# Altium PCB Traffic_light.PcbDoc
Units mil, origin at the board's own origin, x right, y up, seen from the top; angles counter-clockwise.
Board outline 4035 x 3120 mil, 2 copper layers (Top Layer, Bottom Layer); 110 components, 113 nets, 333 pads, 48 vias.
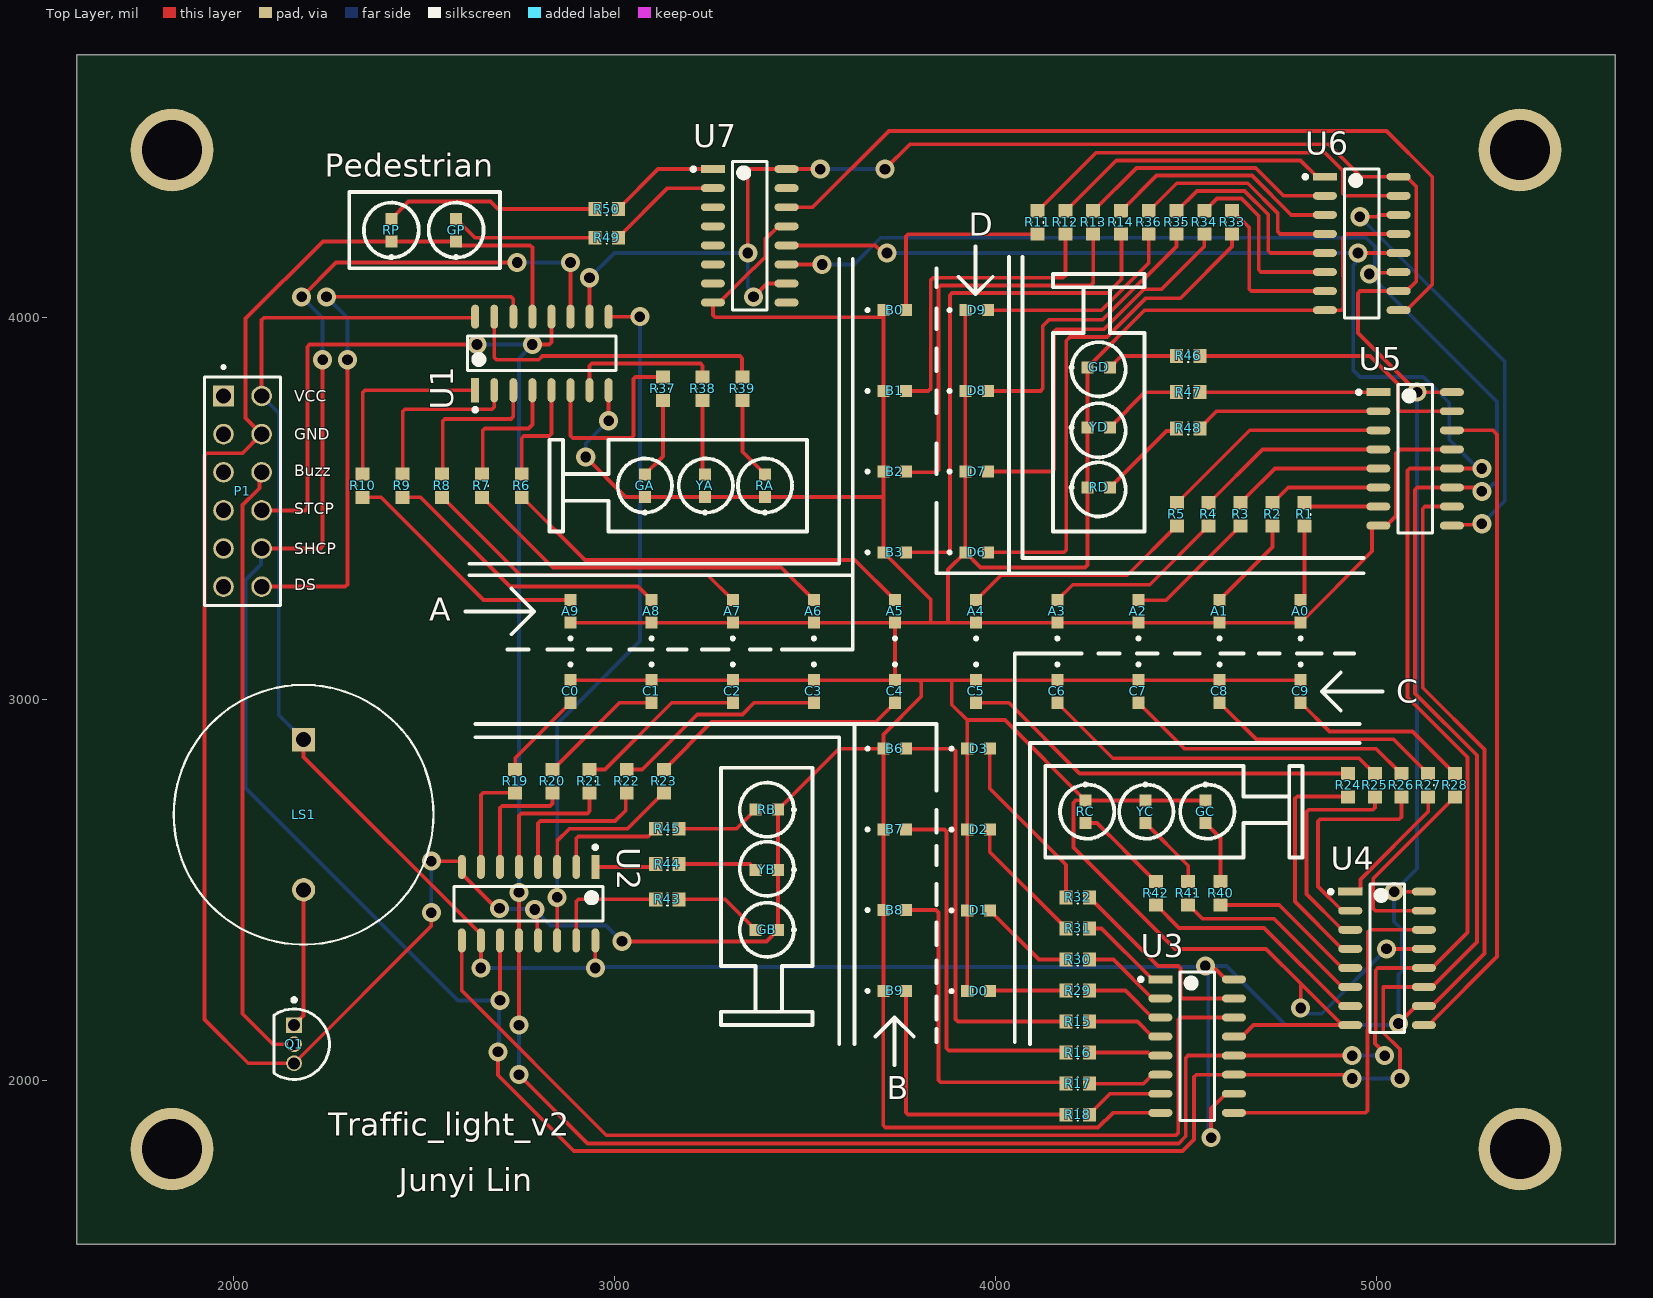
[diagram p0: Top Layer view]
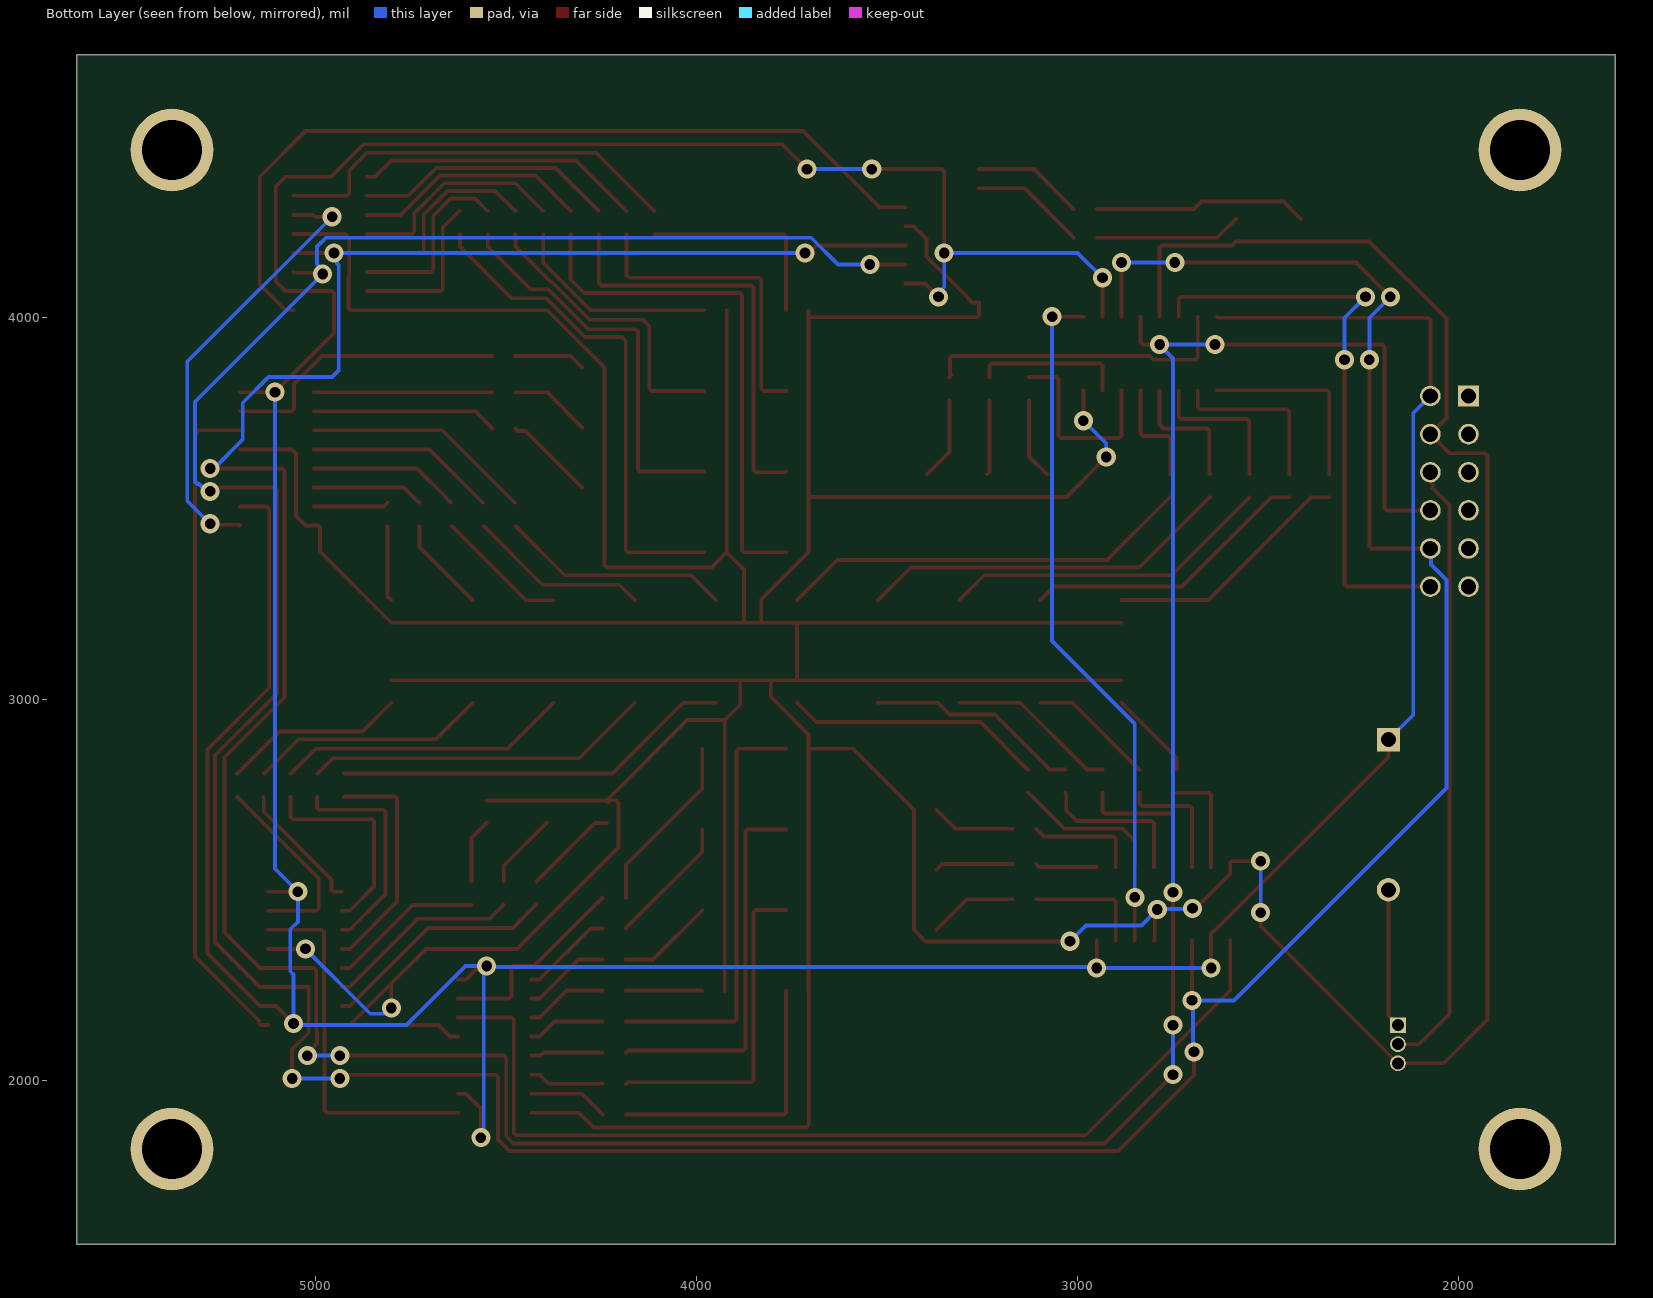
[diagram p1: Bottom Layer view, seen from below]
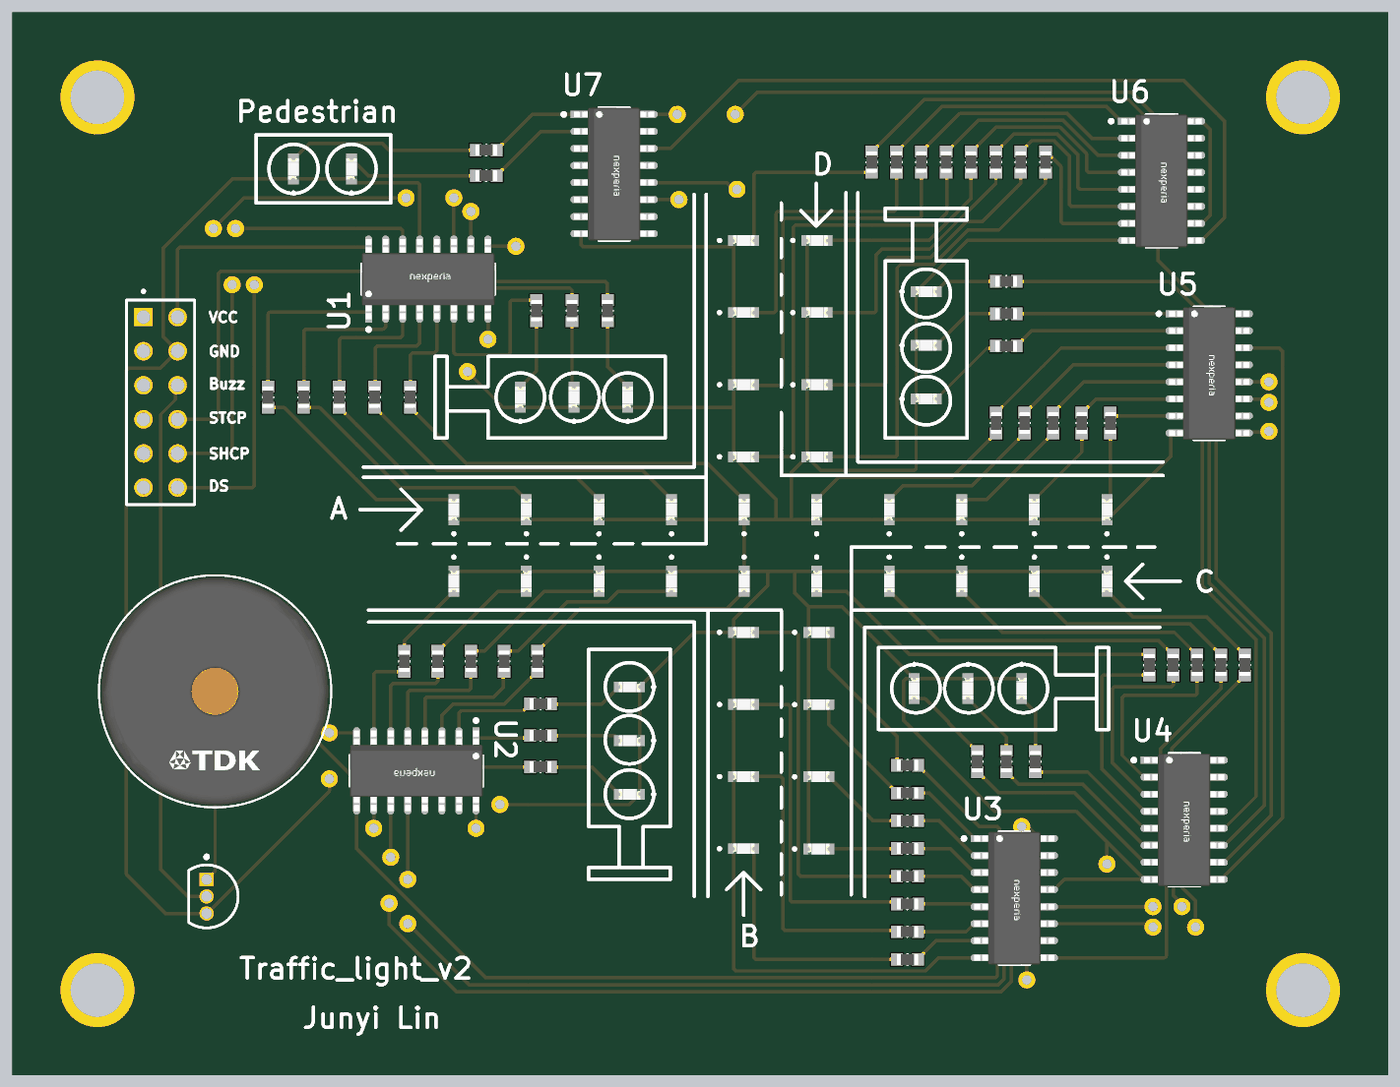
[diagram p2: 3D render of the assembled board from above, using the file's embedded part models]

## Layer stack, top to bottom
Top Solder: solder mask 0.4, Solder Resist, Dk 3.5
Top Layer: signal copper 1.4
Dielectric 1: dielectric 12.6, FR-4, Dk 4.8
Bottom Layer: signal copper 1.4
Bottom Solder: solder mask 0.4, Solder Resist, Dk 3.5

## Board outline
1590,1570 1590,4690 5625,4690 5625,1570

## Design rules (kind name [scope] priority, off if disabled: settings)
Clearance [All] p1: gap=10 ignorepadtopadclearanceinfootprint=FALSE
HoleSize [All] p1: absolutevalues=TRUE maxlimit=200 minlimit=1 maxpercent=80.000 minpercent=20.000
PolygonConnect [All] p1: connectstyle=Relief reliefconductorwidth=10 reliefentries=4 polygonreliefangle="90 Angle" airgapwidth=10
RoutingVias [All] p1: holewidth=28 width=50 viastyle="Through Hole" minholewidth=28 minwidth=50 maxholewidth=28 maxwidth=50
SolderMaskExpansion [All] p1: expansion=0 istentingtop=FALSE
SupplyNets "Schematic Supply Nets" [InNet('GND')] p1: voltage=0.000
Width [All] p1: maxlimit=10 minlimit=10 preferedwidth=10
29 further rules are at their usual default settings.

## Components (designator, comment, footprint, x,y, rotation, side; value= is the part's Value field where it differs from the comment)
A0 "KT-0603W" LED_KT-0603R 4800,3230 r90 top
A1 "KT-0603W" LED_KT-0603R 4587.22,3230 r90 top
A2 "KT-0603W" LED_KT-0603R 4374.44,3230 r90 top
A3 "KT-0603W" LED_KT-0603R 4161.67,3230 r90 top
A4 "KT-0603W" LED_KT-0603R 3948.89,3230 r90 top
A5 "KT-0603W" LED_KT-0603R 3736.11,3230 r90 top
A6 "KT-0603W" LED_KT-0603R 3523.33,3230 r90 top
A7 "KT-0603W" LED_KT-0603R 3310.56,3230 r90 top
A8 "KT-0603W" LED_KT-0603R 3097.78,3230 r90 top
A9 "KT-0603W" LED_KT-0603R 2885,3230 r90 top
B0 "KT-0603W" LED_KT-0603R 3735,4020 r0 top
B1 "KT-0603W" LED_KT-0603R 3735,3808.33 r0 top
B2 "KT-0603W" LED_KT-0603R 3735,3596.67 r0 top
B3 "KT-0603W" LED_KT-0603R 3735,3385 r0 top
B6 "KT-0603W" LED_KT-0603R 3735,2870 r0 top
B7 "KT-0603W" LED_KT-0603R 3735,2658.33 r0 top
B8 "KT-0603W" LED_KT-0603R 3735,2446.67 r0 top
B9 "KT-0603W" LED_KT-0603R 3735,2235 r0 top
C0 "KT-0603W" LED_KT-0603R 2885,3020 r270 top
C1 "KT-0603W" LED_KT-0603R 3097.78,3020 r270 top
C2 "KT-0603W" LED_KT-0603R 3310.56,3020 r270 top
C3 "KT-0603W" LED_KT-0603R 3523.33,3020 r270 top
C4 "KT-0603W" LED_KT-0603R 3736.11,3020 r270 top
C5 "KT-0603W" LED_KT-0603R 3948.89,3020 r270 top
C6 "KT-0603W" LED_KT-0603R 4161.67,3020 r270 top
C7 "KT-0603W" LED_KT-0603R 4374.44,3020 r270 top
C8 "KT-0603W" LED_KT-0603R 4587.22,3020 r270 top
C9 "KT-0603W" LED_KT-0603R 4800,3020 r270 top
D0 "KT-0603W" LED_KT-0603R 3955,2234 r0 top
D1 "KT-0603W" LED_KT-0603R 3955,2446 r0 top
D2 "KT-0603W" LED_KT-0603R 3955,2658 r0 top
D3 "KT-0603W" LED_KT-0603R 3955,2870 r0 top
D6 "KT-0603W" LED_KT-0603R 3950,3385 r0 top
D7 "KT-0603W" LED_KT-0603R 3950,3596.67 r0 top
D8 "KT-0603W" LED_KT-0603R 3950,3808.33 r0 top
D9 "KT-0603W" LED_KT-0603R 3950,4020 r0 top
GA "KT-0603G" LED_KT-0603R 3080,3560 r90 top
GB "KT-0603G" LED_KT-0603R 3400,2395 r180 top
GC "KT-0603G" LED_KT-0603R 4550,2705 r270 top
GD "KT-0603G" LED_KT-0603R 4270,3870 r0 top
GP "KT-0603G" LED_KT-0603R 2585,4230 r90 top
LS1 "PS1720P02" FP-PS1720P02-MFG 2185,2696.85 r270 top
P1 "TSW-106-07-T-D" SAMTEC_TSW-106-07-T-D 2025,3545 r270 top
Q1 "BS170" ONSC-TO-92-3-29-11 2160,2095 r270 top
R1 "Res1" RESC1608X55N 4810,3484.29 r270 top value=270
R2 "Res1" RESC1608X55N 4726.25,3484.29 r270 top value=270
R3 "Res1" RESC1608X55N 4642.5,3484.29 r270 top value=270
R4 "Res1" RESC1608X55N 4558.75,3484.29 r270 top value=270
R5 "Res1" RESC1608X55N 4475,3484.29 r270 top value=270
R6 "Res1" RESC1608X55N 2757.14,3560 r270 top value=270
R7 "Res1" RESC1608X55N 2652.86,3560 r270 top value=270
R8 "Res1" RESC1608X55N 2548.57,3560 r270 top value=270
R9 "Res1" RESC1608X55N 2444.29,3560 r270 top value=270
R10 "Res1" RESC1608X55N 2340,3560 r270 top value=270
R11 "Res1" RESC1608X55N 4110,4250 r270 top value=270
R12 "Res1" RESC1608X55N 4182.86,4250 r270 top value=270
R13 "Res1" RESC1608X55N 4255.71,4250 r270 top value=270
R14 "Res1" RESC1608X55N 4328.57,4250 r270 top value=270
R15 "Res1" RESC1608X55N 4215,2154.29 r180 top value=270
R16 "Res1" RESC1608X55N 4215,2072.86 r180 top value=270
R17 "Res1" RESC1608X55N 4215,1991.43 r180 top value=270
R18 "Res1" RESC1608X55N 4215,1910 r180 top value=270
R19 "Res1" RESC1608X55N 2740,2785 r90 top value=270
R20 "Res1" RESC1608X55N 2837.5,2785 r90 top value=270
R21 "Res1" RESC1608X55N 2935,2785 r90 top value=270
R22 "Res1" RESC1608X55N 3032.5,2785 r90 top value=270
R23 "Res1" RESC1608X55N 3130,2785 r90 top value=270
R24 "Res1" RESC1608X55N 4924.25,2774.02 r90 top value=270
R25 "Res1" RESC1608X55N 4994.25,2774.02 r90 top value=270
R26 "Res1" RESC1608X55N 5064.25,2774.02 r90 top value=270
R27 "Res1" RESC1608X55N 5134.25,2774.02 r90 top value=270
R28 "Res1" RESC1608X55N 5204.25,2774.02 r90 top value=270
R29 "Res1" RESC1608X55N 4215,2235.71 r180 top value=270
R30 "Res1" RESC1608X55N 4215,2317.14 r180 top value=270
R31 "Res1" RESC1608X55N 4215,2398.57 r180 top value=270
R32 "Res1" RESC1608X55N 4215,2480 r180 top value=270
R33 "Res1" RESC1608X55N 4620,4250 r270 top value=270
R34 "Res1" RESC1608X55N 4547.14,4250 r270 top value=270
R35 "Res1" RESC1608X55N 4474.28,4250 r270 top value=270
R36 "Res1" RESC1608X55N 4401.43,4250 r270 top value=270
R37 "Res1" RESC1608X55N 3127.18,3814.02 r270 top value=270
R38 "Res1" RESC1608X55N 3231.46,3814.02 r270 top value=270
R39 "Res1" RESC1608X55N 3335.75,3814.02 r270 top value=270
R40 "Res1" RESC1608X55N 4590,2490.71 r90 top value=270
R41 "Res1" RESC1608X55N 4505,2490.71 r90 top value=270
R42 "Res1" RESC1608X55N 4420,2490.71 r90 top value=270
R43 "Res1" RESC1608X55N 3139.29,2475 r0 top value=270
R44 "Res1" RESC1608X55N 3139.29,2567.5 r0 top value=270
R45 "Res1" RESC1608X55N 3139.29,2660 r0 top value=270
R46 "Res1" RESC1608X55N 4505,3900 r180 top value=270
R47 "Res1" RESC1608X55N 4505,3805 r180 top value=270
R48 "Res1" RESC1608X55N 4505,3710 r180 top value=270
R49 "Res1" RESC1608X55N 2980,4210 r180 top value=270
R50 "Res1" RESC1608X55N 2980,4285 r180 top value=270
RA "KT-0603R" LED_KT-0603R 3395,3560 r90 top
RB "KT-0603R" LED_KT-0603R 3400,2710 r180 top
RC "KT-0603R" LED_KT-0603R 4235,2705 r270 top
RD "KT-0603R" LED_KT-0603R 4270,3555 r0 top
RP "KT-0603R" LED_KT-0603R 2415,4230 r90 top
U1 "74HC595D,118" FP-SOT109-1-IPC_C 2810,3906.49 r90 top
U2 "74HC595D,118" FP-SOT109-1-IPC_C 2775,2463.51 r270 top
U3 "74HC595D,118" FP-SOT109-1-IPC_C 4528.51,2090 r0 top
U4 "74HC595D,118" FP-SOT109-1-IPC_C 5026.49,2320 r0 top
U5 "74HC595D,118" FP-SOT109-1-IPC_C 5100,3630 r0 top
U6 "74HC595D,118" FP-SOT109-1-IPC_C 4960,4195 r0 top
U7 "74HC595D,118" FP-SOT109-1-IPC_C 3355,4215 r0 top
YA "KT-0603Y" LED_KT-0603R 3237.5,3560 r90 top
YB "KT-0603Y" LED_KT-0603R 3400,2552.5 r180 top
YC "KT-0603Y" LED_KT-0603R 4392.5,2705 r270 top
YD "KT-0603Y" LED_KT-0603R 4270,3712.5 r0 top

## Footprints (in the part's own frame and the unit in brackets; to place one, negate y for a bottom-side part, rotate by r counter-clockwise, add the part's x,y. Pads: shape width x height; smd on the part's side, far side on the other; paste and mask are expansions set on the pad)
FP-PS1720P02-MFG [mm]
  rect 1.55x1.55 hole 1 paste-2539.97 mask+0: 1(-5,0)
  round 1.55 hole 1 paste-2539.97 mask+0: 2(5,0)
  silkscreen extent -8.65,-8.65 8.65,8.65, body extent -8.75,-8.75 8.75,8.75, height 0.25
FP-SOT109-1-IPC_C [mil]
  rect 63.17x20.79 smd paste+0 mask+0: 1(-96.49,175)
  rrect100% 63.17x20.79 smd paste+0 mask+0: 2(-96.49,125) 3(-96.49,75) 4(-96.49,25) 5(-96.49,-25) 6(-96.49,-75) 7(-96.49,-125) 8(-96.49,-175) 9(96.49,-175) 10(96.49,-125) 11(96.49,-75) 12(96.49,-25) 13(96.49,25) 14(96.49,75) 15(96.49,125) 16(96.49,175)
  silkscreen extent -153,-195 45,195, body extent -132,-199 132,199, height 10
LED_KT-0603R [mm]
  rect 0.8x0.8 smd: A(0.75,0) C(-0.75,0)
  silkscreen extent -1.9,-0.1 -1.7,0.1, body extent -0.8,-0.4 0.8,0.4, height 0.65
ONSC-TO-92-3-29-11 [mm] "TO, 3-Leads, Body Dia 4.7mm, Pitch 1.27mm"
  rect 1.05x1.05 hole 0.8: 1(-1.27,0)
  round 1.05 hole 0.8: 2(0,0) 3(1.27,0)
  silkscreen extent -3.07,-1.34 2.35,2.35, body extent -2.35,-1.33 2.36,2.36, height 7.87
RESC1608X55N [mm]
  rect 0.87x0.93 smd paste+0 mask+0.102: 1(-0.78,0) 2(0.78,0)
  silkscreen extent -0.03,-0.4 0.03,0.4, body extent -0.8,-0.4 0.8,0.4, height 0.55
SAMTEC_TSW-106-07-T-D [mm]
  rect 1.37x1.37 hole 1.02: 01(-6.35,-1.27)
  round 1.37 hole 1.02: 02(-6.35,1.27) 03(-3.81,-1.27) 04(-3.81,1.27) 05(-1.27,-1.27) 06(-1.27,1.27) 07(1.27,-1.27) 08(1.27,1.27) 09(3.81,-1.27) 10(3.81,1.27) 11(6.35,-1.27) 12(6.35,1.27)
  silkscreen extent -8.37,-2.54 7.62,2.54

## Part data
A0 A1 A2 A3 A4 A5 A6 A7 A8 A9 B0 B1 B2 B3 B6 B7 B8 B9 C0 C1 C2 C3 C4 C5 C6 C7 C8 C9 D0 D1 D2 D3 D6 D7 D8 D9: library part KT-0603R, "White 0603 Light Emitting Diodes", JLCPCB Part=C2290, Package=Package, Check_prices=https://www.snapeda.com/parts/KT-0603R/Hubei+KENTO+Elec/view-part/?ref=eda, MF="Hubei KENTO Elec", MP=KT-0603W, SnapEDA_Link=https://www.snapeda.com/parts/KT-0603R/Hubei+KENTO+Elec/view-part/?ref=snap
GA GB GC GD GP: library part KT-0603R, "Green 0603 Light Emitting Diodes", JLCPCB Part=C12624, Package=Package, Check_prices=https://www.snapeda.com/parts/KT-0603R/Hubei+KENTO+Elec/view-part/?ref=eda, MF="Hubei KENTO Elec", MP=KT-0603G, SnapEDA_Link=https://www.snapeda.com/parts/KT-0603R/Hubei+KENTO+Elec/view-part/?ref=snap
LS1: library part CMP-08413-000001-1, "AUDIO PIEZO TRANSDUCER 30V TH", Frequency=2kHz, Manufacturer="TDK Corporation", Package=0, Temperature="-10°C to +70°C", Temperature Range High=+70°C, Temperature Range Low=-10°C, Automotive=No, Category=Speak, ComponentLink2Description=Datasheet, ComponentLink2URL=https://product.tdk.com/info/en/catalog/datasheets/piezoelectronic_buzzer_ps_en.pdf, Device Class L1=Electromechanical, Device Class L2="Audio Products", Device Class L3=Buzzers, Digikey Description="AUDIO PIEZO TRANSDUCER 30V TH", Height=8.3mm, Lead Free=Yes, Manufacturer Part Number=PS1720P02, Mouser Description="Audio Indicators & Alerts Round 17mmx8mm 2 kHz Vin=3V", Octopart=https://octopart.com/ps1720p02-tdk-154429, RoHS=TRUE, Standoff Height=0.5mm
P1: "TSW - Samtec 2.54mm Pin Header 10.92mm Overall Pin Length (07) - Fast Stock", Package=None, Supplier Part Number 1=1802231, Availability="In Stock", Check_prices=https://www.snapeda.com/parts/TSW-106-07-T-D/Samtec/view-part/2815469/?ref=eda, MF=Samtec, MP=TSW-106-07-T-D, Price=None, Purchase-URL=https://pricing.snapeda.com/search/part/TSW-106-07-T-D/?ref=eda, SnapEDA_Link=https://www.snapeda.com/parts/TSW-106-07-T-D/Samtec/view-part/2815469/?ref=snap, Supplier 1=RS
Q1: library part CMP-1058-00929-1, "Small Signal MOSFET, 500 mA, 60 V, N-Channel, 3-Pin TO-92, Bulk Box", Manufacturer="On Semiconductor", Package Type=TO-92, Channel Polarity="N Channel", ComponentLink1Description="Manufacturer URL", ComponentLink1URL=http://www.onsemi.com/, ComponentLink2Description=Datasheet, ComponentLink2URL=http://www.onsemi.com/pub_link/Collateral/BS170-D.PDF, ComponentLink3Description="Package Specification", ComponentLink3URL=http://www.onsemi.cn/pub_link/Collateral/2N6426-D.PDF, Configuration=Single, DatasheetVersion="Rev. 6", ID Max (A)=0.5, Mounting Technology="Through Hole", PackageDescription="3-Pin Transistor Outline, Body 4.825 x 3.685 mm, Pitch 1.27 mm", PackageReference=TO-92-3-29-11_AM_SL, PackageVersion="Rev. AM", Packing="Bulk Box", PartNumber=BS170, PD Max (W)=0.35, V(BR)DSS Min (V)=60, VGS Max (V)=20, VGS(th) Max (V)=3
R1 R2 R3 R4 R5 R6 R7 R8 R9 R10 R11 R12 R13 R14 R15 R16 R17 R18 R19 R20 R21 R22 R23 R24 R25 R26 R27 R28 R29 R30 R31 R32 R33 R34 R35 R36 R37 R38 R39 R40 R41 R42 R43 R44 R45 R46 R47 R48 R49 R50: "resistor", JLCPCB Part=C22966, Supplier Part Number 1=CFR-25JB-52-270R, LatestRevisionDate=17-Jul-2002, LatestRevisionNote="Re-released for DXP Platform.", PackageDescription="Axial Device, Thru-Hole; 2 Leads; 0.3 in Pin Spacing", PackageReference=AXIAL-0.3, Published=8-Jun-2000, Publisher="Altium Limited", Supplier 1=Farnell
RA RB RC RD RP: "Red 0603 Light Emitting Diodes", JLCPCB Part=C2286, Package=Package, Check_prices=https://www.snapeda.com/parts/KT-0603R/Hubei+KENTO+Elec/view-part/?ref=eda, MF="Hubei KENTO Elec", MP=KT-0603R, SnapEDA_Link=https://www.snapeda.com/parts/KT-0603R/Hubei+KENTO+Elec/view-part/?ref=snap
U1 U2 U3 U4 U5 U6 U7: library part CMP-14351-000006-1, "IC SHIFT REGISTER 8BIT 16SOIC", JLCPCB Part=C5947, RoHS Compliant=Yes
YA YB YC YD: library part KT-0603R, "Yellow 0603 Light Emitting Diodes", JLCPCB Part=C2287, Package=Package, Check_prices=https://www.snapeda.com/parts/KT-0603R/Hubei+KENTO+Elec/view-part/?ref=eda, MF="Hubei KENTO Elec", MP=KT-0603R, SnapEDA_Link=https://www.snapeda.com/parts/KT-0603R/Hubei+KENTO+Elec/view-part/?ref=snap

## Free pads (board coordinates)
  round 216.54 hole 157.48: 2(1840,4440) 3(5375,4440) 4(5375,1820) 5(1840,1820)

## Via types
v1: diameter 50, hole 28, Top Layer to Bottom Layer, 48 vias

## Nets (pads, with @x,y where several pads share a name; then routed paths per layer and width w, separated by ;. In a path a pad name is that pad's centre, name@x,y a point inside that pad or via, vN(x,y) a via of type N, cw(c..) or ccw(c..) an arc to the next point about the centre after c; other vN are vias at no path point)
A0: R1.1 U5.7 | length 197.7
  Top Layer w10: R1.1 4820,3505 U5.7
A1: R2.1 U5.6 | length 293.8
  Top Layer w10: R2.1 4727.43,3515 4767.43,3555 U5.6
A2: R3.1 U5.5 | length 399
  Top Layer w10: R3.1 4643.68,3515 4655.81,3527.13 4655.81,3528.31 4732.5,3605 U5.5
A3: R4.1 U5.4 | length 502.7
  Top Layer w10: R4.1 4559.93,3515 4699.93,3655 U5.4
A4: R5.1 U5.3 | length 607.2
  Top Layer w10: R5.1 4476.18,3515 4666.18,3705 U5.3
A5: R6.1 U1.5 | length 290.3
  Top Layer w10: R6.1 2757.14,3684.14 2763,3690 2829.14,3690 2835,3695.86 U1.5
A6: R7.1 U1.4 | length 340.9
  Top Layer w10: R7.1 2655,3592.85 2655,3704.14 2660.86,3710 2775,3710 2785,3720 U1.4
A7: R8.1 U1.3 | length 398
  Top Layer w10: R8.1 2550,3592.14 2550,3729.14 2555.86,3735 2729.14,3735 2735,3740.86 U1.3
A8: R9.1 U1.2 | length 452.7
  Top Layer w10: R9.1 2445,3591.42 2445,3754.14 2450.86,3760 2679.14,3760 2685,3765.86 U1.2
A9: R10.1 U1.1 | length 510.9
  Top Layer w10: R10.1 2340,3804.14 2345.86,3810 U1.1
B0: R11.1 U6.15 | length 1091.8
  Top Layer w10: R11.1 4111.18,4280.71 4263.31,4432.83 4863.86,4432.83 4910.09,4386.61 4910.09,4325.86 4915.95,4320 U6.15
B1: R12.1 U6.1 | length 753.1
  Top Layer w10: R12.1 4184.04,4280.71 4316.16,4412.83 4799.48,4412.83 4842.32,4370 U6.1
B2: R13.1 U6.2 | length 684.4
  Top Layer w10: R13.1 4256.9,4280.71 4369.02,4392.83 4682.17,4392.83 4755,4320 U6.2
B3: R14.1 U6.3 | length 615.7
  Top Layer w10: R14.1 4329.75,4280.71 4421.88,4372.83 4672.17,4372.83 4775,4270 U6.3
B6: R15.1 U3.4 | length 202.6
  Top Layer w10: R15.1 4371.54,2154.29 4410.83,2115 U3.4
B7: R16.1 U3.5 | length 189.6
  Top Layer w10: R16.1 4400.05,2072.86 4407.91,2065 U3.5
B8: R17.1 U3.6 | length 196.1
  Top Layer w10: R17.1 4387.26,1991.43 4410.83,2015 U3.6
B9: R18.1 U3.7 | length 209.8
  Top Layer w10: R18.1 4245.71,1911.18 4299.53,1965 U3.7
Buzz: P1.06 Q1.2 | length 1608.8
  Top Layer w10: P1.06 2068.98,3588.98 2068.98,3553.03 2025,3509.06 2025,2175 2105,2095 Q1.2
C0: R19.1 U2.7 | length 280.9
  Top Layer w10: U2.7 2650,2748.43 2655.86,2754.29 R19.1
C1: R20.1 U2.6 | length 324.9
  Top Layer w10: U2.6 2700,2714.14 2705.86,2720 2831.64,2720 2837.5,2725.86 R20.1
C2: R21.1 U2.5 | length 372.4
  Top Layer w10: U2.5 2750,2694.14 2755.86,2700 2929.14,2700 2935,2705.86 R21.1
C3: R22.1 U2.4 | length 405.3
  Top Layer w10: U2.4 2800,2674.14 2805.86,2680 3001.72,2680 3030,2708.28 3030,2751.79 R22.1
C4: R23.1 U2.3 | length 400.1
  Top Layer w10: U2.3 2850,2627.68 2882.32,2660 3034.53,2660 3128.82,2754.29 R23.1
C5: R24.1 U4.4 | length 609
  Top Layer w10: R24.1 4922.56,2745 4790.86,2745 4785,2739.14 4785,2468.81 4908.81,2345 U4.4
C6: R25.1 U4.3 | length 581.8
  Top Layer w10: U4.3 4908.81,2395 4815,2488.81 4815,2704.14 4820.86,2710 4989.14,2710 4995,2715.86 4995,2742.56 R25.1
C7: R26.1 U4.2 | length 558.3
  Top Layer w10: U4.2 4908.81,2445 4845,2508.81 4845,2679.14 4850.86,2685 5058.39,2685 5064.25,2690.86 R26.1
C8: R27.1 U4.1 | length 345.3
  Top Layer w10: U4.1 4951.19,2495 4956.58,2500.39 4956.58,2526.95 5134.25,2704.62 R27.1
C9: R28.1 U4.15 | length 517.3
  Top Layer w10: U4.15 4995.86,2445 4990,2450.86 4990,2529.05 5190.94,2730 5190.94,2731.18 5203.07,2743.31 R28.1
D0: R29.1 U3.3 | length 215.6
  Top Layer w10: R29.1 4340.11,2235.71 4410.83,2165 U3.3
D1: R30.1 U3.2 | length 228.6
  Top Layer w10: R30.1 4308.68,2317.14 4410.83,2215 U3.2
D2: R31.1 U3.1 | length 242
  Top Layer w10: R31.1 4277.83,2398.57 4405.43,2270.97 4405.43,2270.39 4410.83,2265 U3.1
D3: R32.1 U3.15 | length 532.7
  Top Layer w10: R32.1 4245.71,2478.82 4257.83,2466.69 4259.02,2466.69 4425.71,2300 4479.14,2300 4485,2294.14 4485,2220.86 4490.86,2215 U3.15
D6: R33.1 U6.7 | length 425.1
  Top Layer w10: R33.1 4621.18,4280.71 4665,4236.89 4665,4075.86 4670.86,4070 U6.7
D7: R34.1 U6.6 | length 492.4
  Top Layer w10: R34.1 4548.32,4280.71 4580.45,4312.83 4644.52,4312.83 4690,4267.35 4690,4125.86 4695.86,4120 U6.6
D8: R35.1 U6.5 | length 533.8
  Top Layer w10: R35.1 4475.47,4280.71 4527.59,4332.83 4652.8,4332.83 4715,4270.64 4715,4175.86 4720.86,4170 U6.5
D9: R36.1 U6.4 | length 575.1
  Top Layer w10: R36.1 4402.61,4280.71 4474.74,4352.83 4661.09,4352.83 4740,4273.92 4740,4225.86 4745.86,4220 U6.4
DS: P1.12 U1.14 | length 1542.9
  Top Layer w10: P1.12 2294.14,3295 2300,3300.86 v1(2300,3890) ; v1(2245,4055) 2729.14,4055 2735,4049.14 U1.14
  Bottom Layer w10: v1(2245,4055) 2300,4000 v1(2300,3890)
GA: R37.1 U1.6 | length 517
  Top Layer w10: U1.6 2885,3690.86 2890.86,3685 3044.14,3685 3050,3690.86 3050,3839.14 3055.86,3845 3126.9,3845 R37.1
GB: R43.1 U2.15 | length 313.1
  Top Layer w10: U2.15 2900,2469.14 2905.86,2475 R43.1
GC: R40.1 U4.5 | length 408.3
  Top Layer w10: R40.1 4743.81,2460 4908.81,2295 U4.5
GD: R46.1 U5.15 | length 759.4
  Top Layer w10: R46.1 4981.72,3900 5055,3826.72 5055,3760.86 5060.86,3755 U5.15
GND: A0.C A1.C A2.C A3.C A4.C A5.C A6.C A7.C A8.C A9.C B0.C B1.C B2.C B3.C B6.C B7.C B8.C B9.C C0.C C1.C C2.C C3.C C4.C C5.C C6.C C7.C C8.C C9.C D0.C D1.C D2.C D3.C D6.C D7.C D8.C D9.C GA.C GB.C GC.C GD.C GP.C P1.04 Q1.3 RA.C RB.C RC.C RD.C RP.C U1.8 U1.13 U2.8 U2.13 U3.8 U3.13 U4.8 U4.13 U5.8 U5.13 U6.8 U6.13 U7.8 U7.13 YA.C YB.C YC.C YD.C | length 21208.1
  Top Layer w10: v1(2520,2440) 2520,2404.56 2160.44,2045 Q1.3 2040,2045 1925,2160 1925,3639.14 1930.86,3645 2025,3645 P1.04 2033.03,3736.97 2033.03,3998.03 2235.47,4200.47 RP.C GP.C 2595.47,4190 2779.14,4190 2785,4184.14 U1.13 ; v1(2520,2575) 2595.02,2575 2600,2570.02 U2.8 2600,2541.73 2690.56,2451.17 v1(2698.83,2451.17) ; v1(2791.17,2448.23) 2797.94,2441.46 2797.94,2369.08 U2.13 ; C0.C C1.C C2.C C3.C C4.C ; A9.C A8.C A7.C A6.C A5.C ; v1(2925,3635) 3029.53,3530.47 GA.C YA.C RA.C 3705,3530.47 3705.47,3530 ; v1(2985,3730) U1.8 ; v1(3020,2365) 3020.75,2364.25 3398.78,2364.25 GB.C YB.C RB.C 3589.53,2870 B6.C ; U7.13 3430.3,4240 3396.67,4206.37 3396.67,4160.1 3366.57,4130 3365,4130 3285.09,4050.09 3285.09,4048.31 3276.78,4040 U7.8 3258.51,4007.35 3264.37,4001.49 3703.98,4001.49 3705.47,4000 ; B0.C 3705.47,4000 ; D9.C D8.C D7.C D6.C ; D0.C 3925.31,2234.17 3925.31,2445.83 D1.C D2.C D3.C 3925.47,2944.9 ; U3.8 4307.35,1915 4268.75,1876.4 3710.86,1876.4 3705,1882.26 3705,2234.53 B9.C B8.C B7.C B6.C ; GC.C YC.C RC.C ; U3.13 4646.19,2115 4676.19,2145 U4.8@4908.81,2145 ; v1(4800,2190) 4800,2253.81 ; C9.C C8.C C7.C C6.C C5.C 3885,3049.53 ; U4.8 U4.8@4908.81,2145 ; v1(5025,2345) U4.13 ; U6.13 4920.86,4220 4910.09,4209.23 4910.09,4109.96 4912.5,4107.56 4912.5,4025.86 4906.64,4020 4390.47,4020 GD.C YD.C RD.C 4240.47,3351.33 4234.61,3345.47 3960,3345.47 D6.C ; U5.13 5060.86,3655 5050.09,3644.23 5050.09,3480.39 5024.7,3455 U5.8 4992.3,3455 4987.32,3450.02 4987.32,3387.79 A0.C A1.C A2.C A3.C A4.C 3875,3200.47 ; B6.C 3705.47,2907.12 3805,3006.65 3805,3043.67 3799.14,3049.53 ; 3705.47,3530 B2.C B1.C 3705.47,4000 ; 3705.47,3530 B3.C 3830,3260.47 3830,3200.47 ; C4.C 3799.14,3049.53 ; C4.C A5.C ; A5.C 3830,3200.47 ; 3799.14,3049.53 3885,3049.53 ; 3830,3200.47 3875,3200.47 ; 3875,3200.47 3875,3339.53 D6.C ; 3885,3049.53 3885,2985.37 3925.47,2944.9 ; 3925.47,2944.9 4024.63,2944.9 RC.C ; RC.C 4230.47,2730 4225.47,2735 4210.86,2735 4204.25,2728.39 4204.25,2610.75 4470,2345 4708.81,2345 4800,2253.81 ; 4800,2253.81 U4.8@4908.81,2145
  Bottom Layer w10: v1(2520,2440) v1(2520,2575) ; v1(2698.83,2451.17) 2700.3,2449.7 2789.7,2449.7 v1(2791.17,2448.23) 2832.78,2406.62 2978.38,2406.62 v1(3020,2365) ; v1(2925,3635) 2925,3670 v1(2985,3730) ; v1(4800,2190) 4815,2175 4855,2175 v1(5025,2345)
GP: R49.1 U7.2 | length 302.3
  Top Layer w10: R49.1 3010.71,4211.18 3139.53,4340 U7.2
NetA0_A: A0.A R1.2 | length 198.2
  Top Layer w10: A0.A 4810,3269.53 R1.2
NetA1_A: A1.A R2.2 | length 251.6
  Top Layer w10: A1.A 4726.25,3398.56 R2.2
NetA2_A: A2.A R3.2 | length 348.4
  Top Layer w10: A2.A 4447.26,3259.53 4641.32,3453.58 R3.2
NetA3_A: A3.A R4.2 | length 477.5
  Top Layer w10: A3.A 4202.14,3300 4403.99,3300 4557.57,3453.58 R4.2
NetA4_A: A4.A R5.2 | length 606.5
  Top Layer w10: A4.A 4014.36,3325 4345.24,3325 4473.82,3453.58 R5.2
NetA5_A: A5.A R6.2 | length 1090.7
  Top Layer w10: R6.2 2758.32,3529.29 2922.62,3365 3630.64,3365 A5.A
NetA6_A: A6.A R7.2 | length 982.2
  Top Layer w10: R7.2 2654.04,3529.29 2838.33,3345 3437.86,3345 A6.A
NetA7_A: A7.A R8.2 | length 873.7
  Top Layer w10: R8.2 2549.75,3529.29 2754.04,3325 3245.08,3325 A7.A
NetA8_A: A8.A R9.2 | length 765.2
  Top Layer w10: R9.2 2491.93,3529.29 2726.22,3295 3062.31,3295 A8.A
NetA9_A: A9.A R10.2 | length 656.7
  Top Layer w10: R10.2 2387.64,3529.29 2656.93,3260 2884.53,3260 A9.A
NetB0_A: B0.A R11.2 | length 541.3
  Top Layer w10: B0.A 3764.53,4213.43 3770.39,4219.29 R11.2
NetB1_A: B1.A R12.2 | length 818.5
  Top Layer w10: B1.A 3823.33,3808.33 3830,3815 3830,4099.14 3835.86,4105 4177,4105 4182.86,4110.86 R12.2
NetB2_A: B2.A R13.2 | length 1105.9
  Top Layer w10: B2.A 3766.19,3595 3844.14,3595 3850,3600.86 3850,4079.14 3855.86,4085 4249.86,4085 4255.71,4090.86 R13.2
NetB3_A: B3.A R14.2 | length 1372.4
  Top Layer w10: B3.A 3874.14,3385 3880,3390.86 3880,4059.14 3885.86,4065 4294.05,4065 4330,4100.95 4330,4217.86 R14.2
NetB6_A: B6.A R15.2 | length 1128
  Top Layer w10: B6.A 3888.87,2870 3894.72,2864.14 3894.72,2161.13 3901.57,2154.29 R15.2
NetB7_A: B7.A R16.2 | length 995
  Top Layer w10: B7.A 3865.53,2658.33 3871.39,2652.48 3871.39,2084.47 3877.25,2078.61 4178.54,2078.61 R16.2
NetB8_A: B8.A R17.2 | length 866.5
  Top Layer w10: B8.A 3843.87,2446.67 3849.72,2440.81 3849.72,2001.13 3855.58,1995.28 4179.02,1995.28 R17.2@4184.29,1990
NetB9_A: B9.A R18.2 | length 741.1
  Top Layer w10: B9.A 3764.53,1916.33 3770.39,1910.47 4183.82,1910.47 R18.2
NetC0_A: C0.A R19.2 | length 234.8
  Top Layer w10: R19.2 2740,2845.47 C0.A
NetC1_A: C1.A R20.2 | length 332.7
  Top Layer w10: R20.2 2838.68,2815.71 3013.44,2990.47 C1.A
NetC2_A: C2.A R21.2 | length 447.9
  Top Layer w10: R21.2 2975.85,2815.71 3150.62,2990.47 C2.A
NetC3_A: C3.A R22.2 | length 563.2
  Top Layer w10: R22.2 3073.35,2815.71 3217.37,2959.72 3335.83,2959.72 3366.58,2990.47 C3.A
NetC4_A: C4.A R23.2 | length 678.5
  Top Layer w10: R23.2 3131.18,2815.71 3255.2,2939.72 3685.36,2939.72 C4.A
NetC5_A: C5.A R24.2 | length 1052.3
  Top Layer w10: C5.A 4034.53,2990.47 4220.28,2804.72 R24.2
NetC6_A: C6.A R25.2 | length 909.5
  Top Layer w10: C6.A 4307.14,2845 4952.8,2845 4993.07,2804.72 R25.2
NetC7_A: C7.A R26.2 | length 766.7
  Top Layer w10: C7.A 4494.92,2870 4997.8,2870 5063.07,2804.72 R26.2
NetC8_A: C8.A R27.2 | length 624
  Top Layer w10: C8.A 4682.69,2895 5042.8,2895 5133.07,2804.72 R27.2
NetC9_A: C9.A R28.2 | length 481.2
  Top Layer w10: C9.A 4875.47,2915 5092.8,2915 5203.07,2804.72 R28.2
NetD0_A: D0.A R29.2 | length 200.5
  Top Layer w10: D0.A 3986.24,2235.71 R29.2
NetD1_A: D1.A R30.2 | length 253.1
  Top Layer w10: D1.A 4113.39,2317.14 R30.2
NetD2_A: D2.A R31.2 | length 342.2
  Top Layer w10: D2.A 3984.53,2599.52 4184.29,2399.75 R31.2
NetD3_A: D3.A R32.2 | length 472.7
  Top Layer w10: D3.A 3984.53,2765.47 4184.29,2565.71 R32.2
NetD6_A: D6.A R33.2 | length 1326.5
  Top Layer w10: D6.A 4179.14,3385 4185,3390.86 4185,3940 4195,3950 4292.19,3950 4393.27,4051.08 4483.92,4051.08 4620,4187.17 R33.2
NetD7_A: D7.A R34.2 | length 1056.2
  Top Layer w10: D7.A 4147.48,3596.67 4153.33,3602.52 4153.33,3964.14 4159.19,3970 4283.9,3970 4388.9,4075 4435,4075 4547.14,4187.14 R34.2
NetD8_A: D8.A R35.2 | length 780
  Top Layer w10: D8.A 4117.48,3808.33 4123.33,3814.19 4123.33,3978.33 4140,3995 4280.62,3995 4380.62,4095 4382.12,4095 4474.28,4187.17 R35.2
NetD9_A: D9.A R36.2 | length 548.5
  Top Layer w10: D9.A 4277.34,4020 4401.43,4144.09 R36.2
NetGA_A: GA.A R37.2 | length 213.3
  Top Layer w10: GA.A 3127.18,3636.7 R37.2
NetGB_A: GB.A R43.2 | length 233.6
  Top Layer w10: R43.2 3290.47,2475 GB.A
NetGC_A: GC.A R40.2 | length 170.6
  Top Layer w10: GC.A 4590,2635.47 R40.2
NetGD_A: GD.A R46.2 | length 187.2
  Top Layer w10: GD.A 4329.53,3900 R46.2
NetGP_A: GP.A R49.2 | length 384.8
  Top Layer w10: GP.A 2634.53,4210 R49.2
NetLS1_2: LS1.2 Q1.1 | length 365.4
  Top Layer w10: Q1.1 2185,2170 LS1.2
NetR38_2: R38.2 YA.A | length 196.3
  Top Layer w10: R38.2 3231.46,3595.57 YA.A
NetR39_2: R39.2 RA.A | length 218.3
  Top Layer w10: R39.2 3335.75,3648.78 RA.A
NetR41_2: R41.2 YC.A | length 200.7
  Top Layer w10: YC.A 4505,2562.97 R41.2
NetR42_2: R42.2 RC.A | length 249.4
  Top Layer w10: RC.A 4265.75,2675.47 4336.22,2605 4336.22,2604.02 4418.82,2521.42 R42.2
NetR44_2: R44.2 YB.A | length 206.7
  Top Layer w10: R44.2 3355.47,2567.5 YB.A
NetR45_2: R45.2 RB.A | length 221.2
  Top Layer w10: R45.2 3320.47,2660 RB.A
NetR47_2: R47.2 YD.A | length 213.1
  Top Layer w10: YD.A 4392.03,3805 R47.2
NetR48_2: R48.2 RD.A | length 239
  Top Layer w10: RD.A 4448.02,3703.5 4467.79,3703.5 R48.2
NetR50_2: R50.2 RP.A | length 561.4
  Top Layer w10: RP.A 2460.47,4305 2675,4305 2695,4285 R50.2
RA: R39.1 U1.15 | length 820
  Top Layer w10: U1.15 2685,3895.86 2690.86,3890 2801.57,3890 2811.57,3900 3329.14,3900 3335,3894.14 3335,3855.47 3330,3850.47 R39.1
RB: R45.1 U2.2 | length 294.1
  Top Layer w10: U2.2 2900,2634.14 2905.86,2640 3088.58,2640 3095.28,2646.69 3096.46,2646.69 3108.58,2658.82 R45.1
RC: R42.1 U4.7 | length 619.8
  Top Layer w10: R42.1 4421.18,2460 4481.18,2400 4703.81,2400 4908.81,2195 U4.7
RD: R48.1 U5.2 | length 487.1
  Top Layer w10: R48.1 4535.71,3711.18 4579.53,3755 U5.2
RP: R50.1 U7.1 | length 292
  Top Layer w10: R50.1 3010.71,4286.18 3114.53,4390 U7.1
S1: U1.9 U2.14 | length 1807.9
  Top Layer w10: U2.14 v1(2850,2480) ; U1.9 v1(3067.02,4002.98)
  Bottom Layer w10: v1(2850,2480) 2850,2935 3067.02,3152.02 v1(3067.02,4002.98)
S2: U2.9 U3.14 | length 2615.6
  Top Layer w10: U2.9 2600,2235 2978.6,1856.4 4472.74,1856.4 4478.6,1862.26 4478.6,2159.14 4484.46,2165 U3.14
S3: U3.9 U4.14 | length 970.2
  Top Layer w10: U3.9 4969.14,1915 4975,1920.86 4975,2132.9 4976.58,2134.48 4976.58,2389.14 4982.44,2395 U4.14
S4: U4.9 U5.14 | length 1762.4
  Top Layer w10: U4.9 5141.25,2145 5146.24,2149.98 5146.24,2156.24 5315,2325 5315,3694.14 5304.14,3705 U5.14
S5: U5.9 U6.14 | length 1171.4
  Top Layer w10: v1(4955,4265) 5000.43,4265 5005.43,4270 U6.14 ; U5.9 5198.56,3457.06 5272.06,3457.06 v1(5275,3460)
  Bottom Layer w10: v1(4955,4265) 5335,3885 5335,3520 v1(5275,3460)
S6: U6.9 U7.14 | length 2225.1
  Top Layer w10: U7.14 3520,4290 3720,4490 5025,4490 5145,4370 5145,4087.32 5077.68,4020 U6.9
SHCP: P1.10 U1.11 U2.11 U3.11 U4.11 U5.11 U6.11 U7.11 | length 10713
  Top Layer w10: P1.10 2229.14,3395 2235,3400.86 v1(2235,3890) ; v1(2180,4055) 2270,4145 v1(2745,4145) ; v1(2695,2075) 2695,2013.43 2893.43,1815 4490,1815 4520,1845 4520,2009.14 4525.86,2015 U3.11 4914.18,2015 4924.18,2005 v1(4935,2005) ; v1(2700,2210) U2.11 ; U1.11 v1(2885,4145) ; U7.11 v1(3545,4140) ; v1(4980,4115) 4982.94,4117.94 5054.43,4117.94 U6.11 ; v1(5060,2005) 5060,2081.58 5016.58,2125 5016.58,2245 U4.11 5144.17,2245 5262.07,2362.9 5262.07,2852.93 5100,3015 5100,3549.14 5105.86,3555 5254.18,3555 5264.18,3545 v1(5275,3545)
  Bottom Layer w10: P1.10 2073.68,3393.68 2073.68,3353.03 2033.03,3312.38 2033.03,2766.97 2590,2210 v1(2700,2210) 2697.5,2207.5 2697.5,2077.5 v1(2695,2075) ; v1(2180,4055) 2235,4000 v1(2235,3890) ; v1(2745,4145) v1(2885,4145) ; v1(3545,4140) 3628.43,4140 3698.43,4210 4971.57,4210 4995,4186.57 4995,4140.82 4985,4130.82 v1@4985,4115 ; v1(4935,2005) v1(5060,2005) ; v1(4980,4115) v1@4985,4115 ; v1(5275,3545) 5285.82,3545 5304.61,3563.79 5307.93,3563.79 5315,3570.86 5315,3780 4985,4110 v1@4985,4115
STCP: P1.08 U1.12 U2.12 U3.12 U4.12 U5.12 U6.12 U7.12 | length 10159.2
  Top Layer w10: P1.08 2189.14,3495 2195,3500.86 2195,3924.14 2200.86,3930 v1(2640,3930) ; v1(2750,2015) 2930,1835 4480,1835 4498.6,1853.6 4498.6,2059.14 4504.46,2065 U3.12 v1(4935,2065) ; v1(2750,2145) U2.12 v1(2750,2493.42) ; v1(2785,3930) 2829.14,3930 2835,3935.86 U1.12 ; U7.12 3684.18,4190 3704.18,4170 v1(3715,4170) ; v1(4950.09,4170) U6.12 ; v1(5020,2065) 5020,2071.57 4995,2096.57 4995,2124.61 4996.58,2126.2 4996.58,2289.14 5002.44,2295 U4.12 5144.17,2295 5237.56,2388.39 5237.56,2847.44 5080,3005 5080,3599.14 5085.86,3605 U5.12 v1(5275,3605)
  Bottom Layer w10: v1(2640,3930) v1(2785,3930) 2785,3928.12 2750,3893.12 v1(2750,2493.42) ; v1(2750,2015) v1(2750,2145) ; v1(3715,4170) v1@4945,4170 ; v1(4935,2065) v1(5020,2065) ; v1(4950.09,4170) 4942.44,4162.35 4942.44,4142.44 4937.56,4137.56 4937.56,3863.3 4955.86,3845 5121.57,3845 5189.46,3777.11 5189.46,3680.54 5265,3605 v1(5275,3605)
VCC: LS1.1 P1.02 U1.10 U1.16 U2.10 U2.16 U3.10 U3.16 U4.10 U4.16 U5.10 U5.16 U6.10 U6.16 U7.10 U7.16 | length 12769.9
  Top Layer w10: P1.02 2075,3994.14 2080.86,4000 2632.02,4000 U1.16 ; LS1.1 2185,2848.19 2642.92,2390.27 2645.02,2390.27 2650,2385.29 U2.10 v1(2650,2295) ; U1.10 v1(2935,4105) ; v1(2950,2295) U2.16 ; v1(3350,4170) 3350,4384.14 3355.86,4390 U7.16 v1(3540,4390) ; v1(3365,4055) 3400,4090 U7.10 ; v1(3710,4390) 3775,4455 4872.66,4455 4957.66,4370 U6.16 5077.68,4370 5103.07,4344.61 5103.07,4095.39 5077.68,4070 U6.10 4955.86,4070 4950,4064.14 4950,3960 v1(5105,3805) U5.16 ; v1(4550,2300) 4557.65,2292.35 4576.46,2292.35 4603.81,2265 U3.16 ; v1(4565,1850) 4565,1926.19 4603.81,1965 U3.10 ; v1(5045,2495) U4.16 ; v1(5056.58,2149.08) 5056.58,2149.43 5102.15,2195 U4.10 5144.17,2195 5282.07,2332.9 5282.07,2867.93 5120,3030 5120,3499.14 5125.86,3505 U5.10
  Bottom Layer w10: P1.02 2120,3750 2120,2958.7 LS1.1 ; v1(2650,2295) v1(2950,2295) 2952.5,2297.5 4547.5,2297.5 v1(4550,2300) ; v1(2935,4105) 3000,4170 v1(3350,4170) 3350,4080.82 3365,4065.82 v1(3365,4055) ; v1(3540,4390) v1(3710,4390) ; v1(4565,1850) 4557.5,1857.5 4557.5,2292.5 v1(4550,2300) ; v1(5105,3805) 5105,2555 v1(5045,2495) 5045,2416.3 5065,2396.3 5065,2286.14 5056.58,2277.72 v1(5056.58,2149.08) 5052.51,2145 4760.41,2145 4605.41,2300 v1(4550,2300)
YA: R38.1 U1.7 | length 394.9
  Top Layer w10: U1.7 2935,3874.14 2940.86,3880 3225.6,3880 3231.46,3874.14 R38.1
YB: R44.1 U2.1 | length 161.7
  Top Layer w10: U2.1 3101.08,2560 R44.1
YC: R41.1 U4.6 | length 514.1
  Top Layer w10: R41.1 4506.18,2460 4542.37,2423.81 4730,2423.81 4908.81,2245 U4.6
YD: R47.1 U5.1 | length 467.8
  Top Layer w10: R47.1 U5.1
pads on no net: P1.01 P1.03 P1.05 P1.07 P1.09 P1.11 U7.3 U7.4 U7.5 U7.6 U7.7 U7.9 U7.15

## Silkscreen, mask and mechanical layers (free items; w line width, h text height)
Top Overlay:
  circle w10: c2585,4230 r72.11
  circle w10: c2415,4230 r72.11
  circle w10: c3395,3560 r71.06
  circle w10: c3240,3560 r71.06
  circle w10: c3080,3560 r71.06
  circle w10: c4270,3550 r71.06
  circle w10: c4270,3705 r71.06
  circle w10: c4270,3865 r71.06
  circle w10: c4240,2705 r71.06
  circle w10: c4395,2705 r71.06
  circle w10: c4555,2705 r71.06
  circle w10: c3400,2395 r71.06
  circle w10: c3400,2555 r71.06
  circle w10: c3400,2710 r71.06
  lines w10: 2610,3230 2790,3230 ; 2620,3325 3625,3325 ; 2620,3355 3590,3355 3590,4155 ; 2635,2900 3590,2900 3590,2095 ; 2635,2935 3630,2935 ; 2720,3130 2775,3130 ; 2730,3170 2790,3230 ; 2730,3290 2735,3285 2790,3230 ; 2825,3130 2890,3130 ; 2930,3130 2990,3130 ; 3040,3130 3100,3130 ; 3140,3130 3190,3130 ; 3230,3130 3300,3130 ; 3355,3130 3410,3130 ; 3440,3130 3510,3130 ; 3455,3130 3510,3130 ; 3625,4155 3625,4065 3625,3325 ; 3630,2095 3630,2935 ; 3685,2115 3735,2165 ; 3735,2040 3735,2165 ; 3785,2115 3735,2165 ; 3845,2100 3845,2135 ; 3845,2160 3845,2220 ; 3845,2255 3845,2315 ; 3845,2355 3845,2415 ; 3845,2460 3845,2515 ; 3845,2565 3845,2615 ; 3845,2650 3845,2710 ; 3845,2760 3845,2820 3845,2860 3845,2935 3630,2935 ; 3845,3515 3845,3450 3845,3405 3845,3330 4035,3330 ; 3845,3590 3845,3670 ; 3845,3750 3845,3810 ; 3845,3860 3845,3920 ; 3845,3970 3845,4025 ; 3845,4080 3845,4130 ; 3902.5,4107.5 3947.5,4062.5 ; 3947.5,4187.5 3947.5,4062.5 ; 3992.5,4107.5 3947.5,4062.5 ; 4035,4160 4035,4075 4035,3330 ; 4050,2100 4050,2935 ; 4070,4160 4070,3370 4965,3370 ; 4090,2095 4090,2885 4955,2885 ; 4225,3120 4165,3120 4110,3120 4050,3120 4050,2935 ; 4270,3120 4325,3120 ; 4370,3120 4425,3120 ; 4470,3120 4535,3120 ; 4590,3120 4650,3120 ; 4690,3120 4745,3120 ; 4790,3120 4855,3120 ; 4890,3120 4940,3120 ; 4905,2970 4855,3020 ; 4905,3070 4855,3020 ; 4955,2935 4050,2935 ; 4965,3330 4035,3330 ; 5015,3020 4855,3020 ; 2865,3520 2865,3440 2830,3440 2830,3680 2865,3680 2865,3590 ; 2865,3520 2865,3590 ; 2865,3520 2985,3520 2985,3440 3505,3440 3505,3680 2985,3680 2985,3590 2865,3590 ; 3370,2180 3280,2180 3280,2145 3520,2145 3520,2180 3440,2180 ; 3370,2180 3440,2180 ; 3370,2180 3370,2300 3280,2300 3280,2820 3520,2820 3520,2300 3440,2300 3440,2180 ; 3510,3130 3560,3130 3625,3130 3625,3325 ; 4230,4080 4150,4080 4150,4115 4390,4115 4390,4080 4300,4080 ; 4230,4080 4300,4080 ; 4230,4080 4230,3960 4150,3960 4150,3440 4390,3440 4390,3960 4300,3960 4300,4080 ; 4770,2675 4770,2585 4805,2585 4805,2825 4770,2825 4770,2745 ; 4770,2675 4650,2675 4650,2585 4130,2585 4130,2825 4650,2825 4650,2745 4770,2745 ; 4770,2675 4770,2745 ; 2305,4130 2700,4130 2700,4330 2305,4330 2305,4130
  text "Pedestrian" at 2240,4370 h60
  text "D" at 3930,4215 h60
  text "VCC" at 2160,3780 h30
  text "GND" at 2160,3680 h30
  text "Buzz" at 2160,3585 h30
  text "STCP" at 2160,3485 h30
  text "SHCP" at 2160,3380 h30
  text "DS" at 2160,3285 h30
  text "A" at 2515,3205 h60
  text "C" at 5050,2990 h60
  text "B" at 3715,1950 h60
  text "Traffic_light_v2" at 2250,1854.99 h60
  text "Junyi Lin" at 2435,1709.99 h60